# EAGLE board Line sensors (gerber layout) (EAGLE 9.4.1)
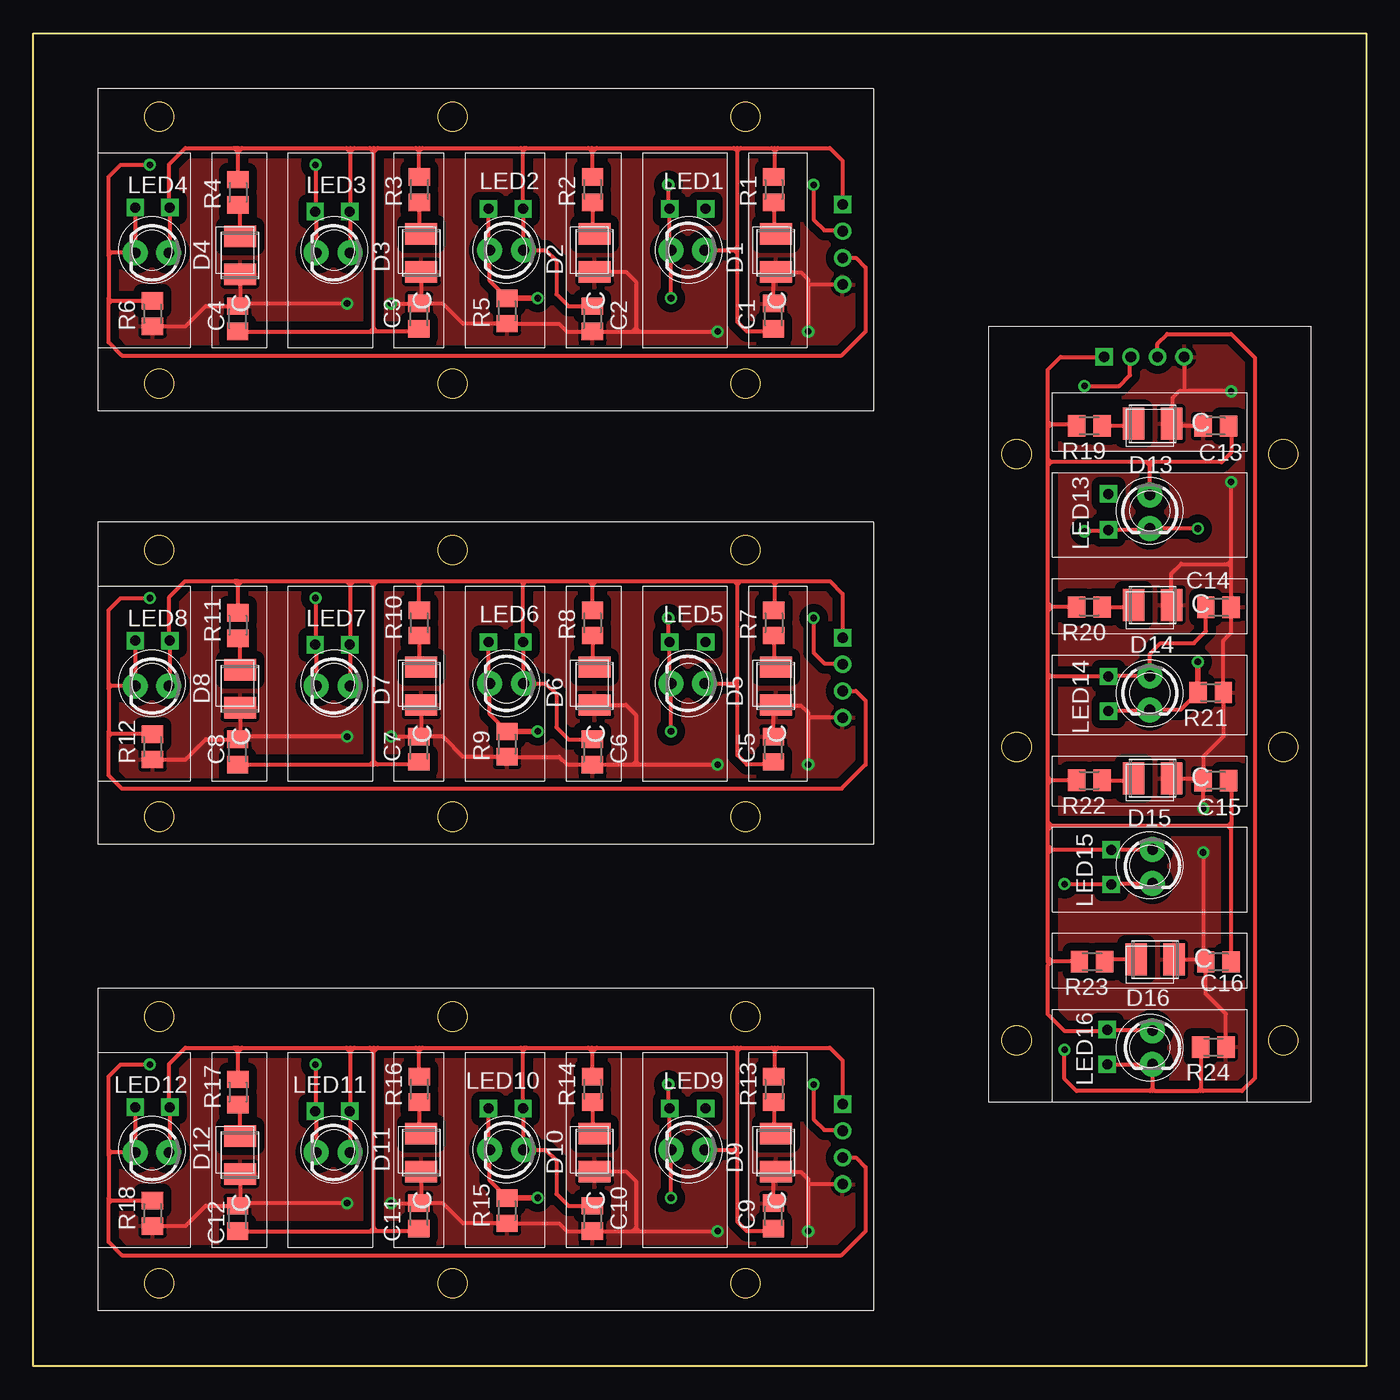
[diagram p0: board, top side]
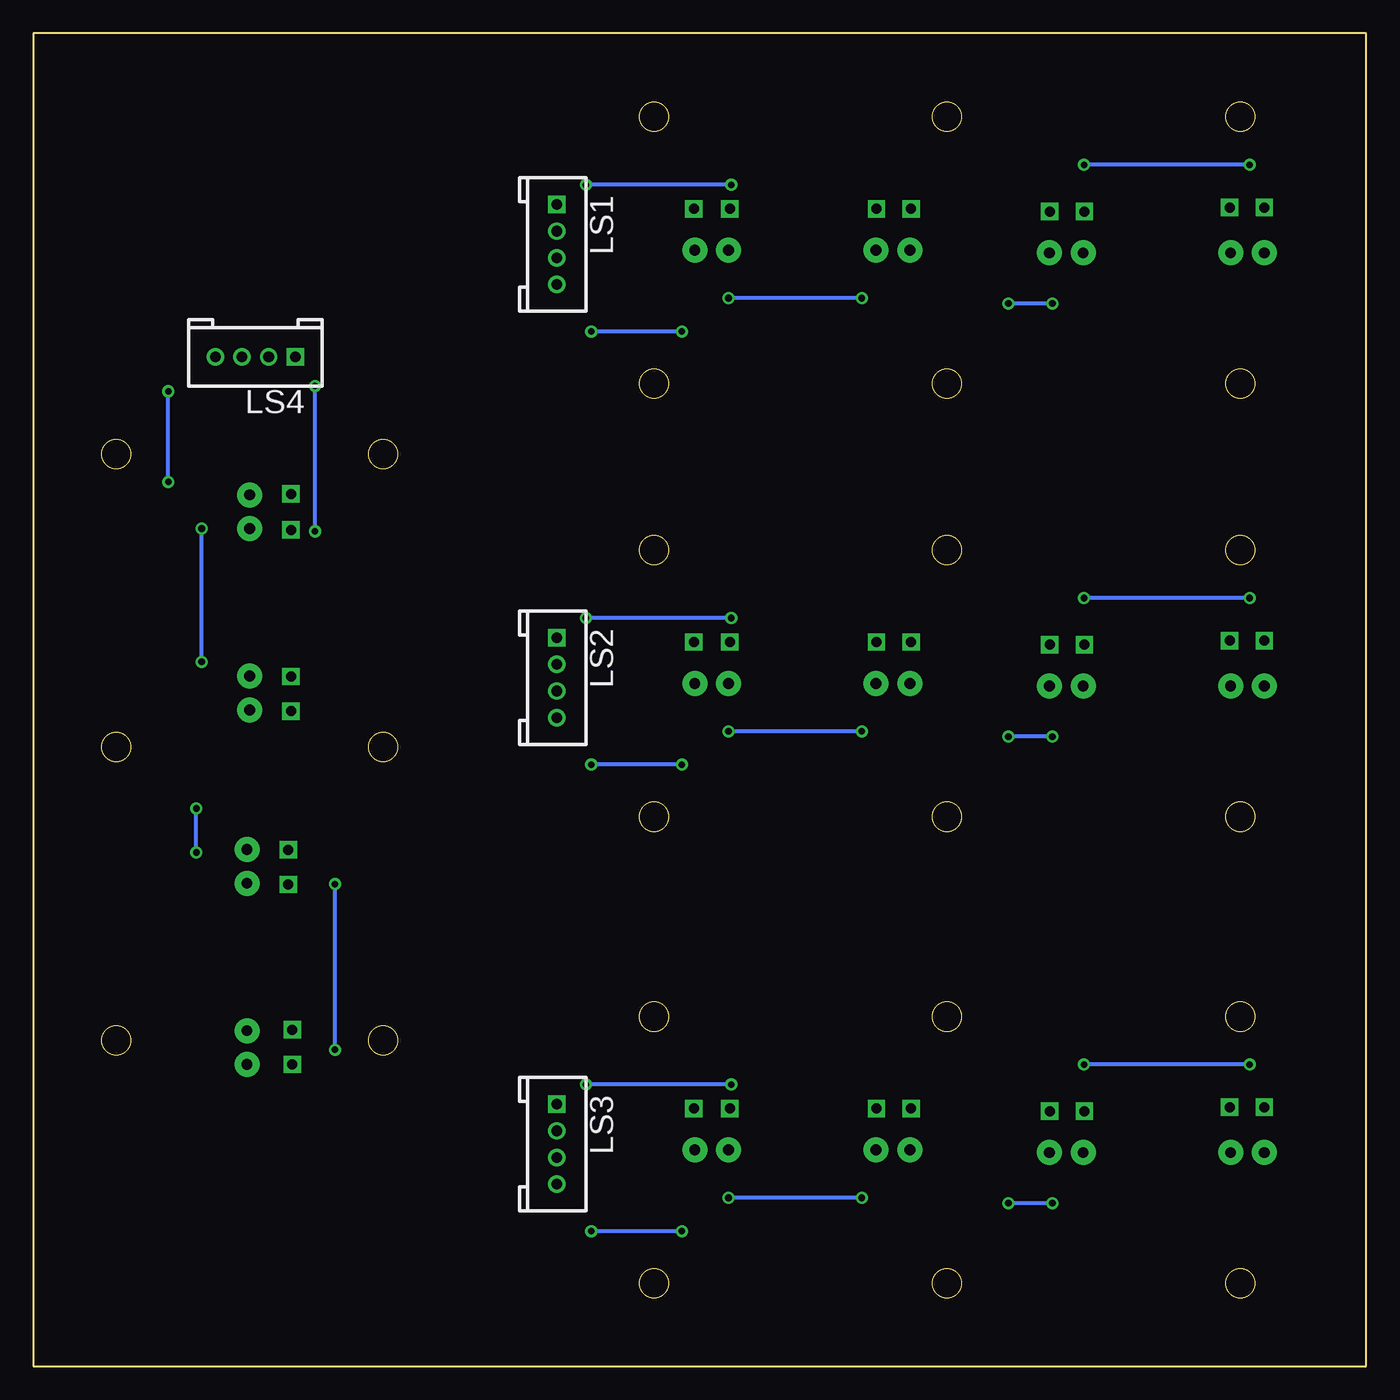
[diagram p1: board, bottom side, seen from below]

Size 100 x 100 mm. Coordinates in mm from the lower left corner, seen from the top.
Outline: 0,0 0,100 100,100 100,0 0,0
Outline: circle at 9.44,73.73 radius 1.1
Outline: circle at 53.44,93.73 radius 1.1
Outline: circle at 31.44,93.73 radius 1.1
Outline: circle at 9.44,93.73 radius 1.1
Outline: circle at 53.44,73.73 radius 1.1
Outline: circle at 31.44,73.73 radius 1.1
Outline: circle at 9.44,73.73 radius 1.1
Outline: circle at 9.44,93.73 radius 1.1
Outline: circle at 9.44,73.73 radius 1.1
Outline: circle at 53.44,93.73 radius 1.1
Outline: circle at 31.44,93.73 radius 1.1
Outline: circle at 9.44,93.73 radius 1.1
Outline: circle at 53.44,73.73 radius 1.1
Outline: circle at 31.44,73.73 radius 1.1
Outline: circle at 9.44,73.73 radius 1.1
Outline: circle at 53.44,93.73 radius 1.1
Outline: circle at 31.44,93.73 radius 1.1
Outline: circle at 9.44,93.73 radius 1.1
Outline: circle at 53.44,73.73 radius 1.1
Outline: circle at 31.44,73.73 radius 1.1
Copper layers (1*16): Top 0.035mm / dielectric 1.5mm / Bottom 0.035mm
Design rules "default": minimum track width 6mil, minimum drill 0.35mm, track to track 6mil, track to pad 6mil, pad to pad 6mil, via to via 6mil, smd to smd 6mil, copper to edge 40mil, drill to drill 6mil, minimum pad ring 10mil, minimum via ring 8mil, stop-mask expansion 4mil, vias tented up to drill 0mil, thermal gap 10mil

## Footprints (pad centres in the part's own frame; a part is rotated, then mirrored left to right if it is on the bottom)
M0805 = smd 1.3 x 1.6: 1 -0.95,0; 2 0.95,0
3528-2PIN = smd 1.6 x 2.4: 1 -1.425,0; 2 1.425,0
LED3MM = drill 0.813 pad 1.88: A -1.27,0; K 1.27,0
4P-2.0 = drill 0.8 pad 1.27 square: 1 -3,0 | drill 0.8 pad 1.27: 2 -1,0; 3 1,0; 4 3,0

## Placement (x,y rotation side)
C1  100n  [M0805]  55.53,78.78 270 top
C2  100n  [M0805]  41.95,78.58 90 top
C3  100n  [M0805]  28.93,78.78 270 top
C4  100n  [M0805]  15.33,78.58 270 top
C5  100n  [M0805]  55.53,46.28 270 top
C6  100n  [M0805]  41.95,46.08 90 top
C7  100n  [M0805]  28.93,46.28 270 top
C8  100n  [M0805]  15.33,46.08 270 top
C9  100n  [M0805]  55.53,11.28 270 top
C10  100n  [M0805]  41.95,11.08 90 top
C11  100n  [M0805]  28.93,11.28 270 top
C12  100n  [M0805]  15.33,11.08 270 top
C13  100n  [M0805]  88.72,70.53 0 top
C14  100n  [M0805]  88.92,56.95 180 top
C15  100n  [M0805]  88.72,43.93 0 top
C16  100n  [M0805]  88.92,30.33 0 top
D1  [3528-2PIN]  55.71,83.53 90 top
D2  [3528-2PIN]  42.11,83.53 90 top
D3  [3528-2PIN]  29.11,83.53 90 top
D4  [3528-2PIN]  15.51,83.33 90 top
D5  [3528-2PIN]  55.71,51.03 90 top
D6  [3528-2PIN]  42.11,51.03 90 top
D7  [3528-2PIN]  29.11,51.03 90 top
D8  [3528-2PIN]  15.51,50.83 90 top
D9  [3528-2PIN]  55.71,16.03 90 top
D10  [3528-2PIN]  42.11,16.03 90 top
D11  [3528-2PIN]  29.11,16.03 90 top
D12  [3528-2PIN]  15.51,15.83 90 top
D13  [3528-2PIN]  83.97,70.71 180 top
D14  [3528-2PIN]  83.97,57.11 180 top
D15  [3528-2PIN]  83.97,44.11 180 top
D16  [3528-2PIN]  84.17,30.51 180 top
LED1  [LED3MM]  49.1,83.73 180 top
LED2  [LED3MM]  35.5,83.73 180 top
LED3  [LED3MM]  22.5,83.53 180 top
LED4  [LED3MM]  8.9,83.53 180 top
LED5  [LED3MM]  49.1,51.23 180 top
LED6  [LED3MM]  35.5,51.23 180 top
LED7  [LED3MM]  22.5,51.03 180 top
LED8  [LED3MM]  8.9,51.03 180 top
LED9  [LED3MM]  49.1,16.23 180 top
LED10  [LED3MM]  35.5,16.23 180 top
LED11  [LED3MM]  22.5,16.03 180 top
LED12  [LED3MM]  8.9,16.03 180 top
LED13  [LED3MM]  83.77,64.1 270 top
LED14  [LED3MM]  83.77,50.5 270 top
LED15  [LED3MM]  83.97,37.5 270 top
LED16  [LED3MM]  83.97,23.9 270 top
LS1  [4P-2.0]  60.72,84.16 270 bottom
LS2  [4P-2.0]  60.72,51.66 270 bottom
LS3  [4P-2.0]  60.72,16.66 270 bottom
LS4  [4P-2.0]  83.34,75.72 180 bottom
R1  330  [M0805]  55.56,88.27 90 top
R2  330  [M0805]  41.96,88.27 90 top
R3  330  [M0805]  28.96,88.27 90 top
R4  330  [M0805]  15.36,88.07 90 top
R5  10k  [M0805]  35.54,79.17 90 top
R6  10k  [M0805]  8.94,78.97 90 top
R7  330  [M0805]  55.56,55.77 90 top
R8  330  [M0805]  41.96,55.77 90 top
R9  10k  [M0805]  35.54,46.67 90 top
R10  330  [M0805]  28.96,55.77 90 top
R11  330  [M0805]  15.36,55.57 90 top
R12  10k  [M0805]  8.94,46.47 90 top
R13  330  [M0805]  55.56,20.77 90 top
R14  330  [M0805]  41.96,20.77 90 top
R15  10k  [M0805]  35.54,11.67 90 top
R16  330  [M0805]  28.96,20.77 90 top
R17  330  [M0805]  15.36,20.57 90 top
R18  10k  [M0805]  8.94,11.47 90 top
R19  330  [M0805]  79.23,70.56 180 top
R20  330  [M0805]  79.23,56.96 180 top
R21  10k  [M0805]  88.33,50.54 180 top
R22  330  [M0805]  79.23,43.96 180 top
R23  330  [M0805]  79.43,30.36 180 top
R24  10k  [M0805]  88.53,23.94 180 top

## Library data of the parts
C1-C16 R1-R24 = resistor
D1-D16 = Wurth_Elektronik_Optoelectronics_rev15b; COMPANY-URL: http://www.we-online.de; CREATED-BY: Christin Otto; CREATED-DATE: APR 2013; DATASHEET-URL: http://katalog.we-online.de/en/led/WL-SMTW?m=t&sq=smtw&sp=&sp=http%3A%2F%2Fwww.we-online.de%2Fweb%2Fen%2Felectronic_components%2Fsearchpage_PBS.php%3Fsearch%3Dsmtw; MANUFACTURER: Würth Elektronik eiSos GmbH
LED1-LED16 = SparkFun
LS1-LS4 = Connector

## Nets
5V: C1.2 C2.2 C3.2 C4.2 LED1.A LED2.A LED3.A LED4.A LS1.1 R1.2 R2.2 R3.2 R4.2
5V1: C5.2 C6.2 C7.2 C8.2 LED5.A LED6.A LED7.A LED8.A LS2.1 R7.2 R8.2 R10.2 R11.2
5V2: C9.2 C10.2 C11.2 C12.2 LED9.A LED10.A LED11.A LED12.A LS3.1 R13.2 R14.2 R16.2 R17.2
5V3: C13.2 C14.2 C15.2 C16.2 LED13.A LED14.A LED15.A LED16.A LS4.1 R19.2 R20.2 R22.2 R23.2
GND: C1.1 C2.1 C3.1 C4.1 D1.1 D2.1 D3.1 D4.1 LS1.4 R5.1 R6.1
GND1: C5.1 C6.1 C7.1 C8.1 D5.1 D6.1 D7.1 D8.1 LS2.4 R9.1 R12.1
GND2: C9.1 C10.1 C11.1 C12.1 D9.1 D10.1 D11.1 D12.1 LS3.4 R15.1 R18.1
GND3: C13.1 C14.1 C15.1 C16.1 D13.1 D14.1 D15.1 D16.1 LS4.4 R21.1 R24.1
N$1: D5.2 R7.1
N$2: D6.2 R8.1
N$3: D1.2 R1.1
N$4: D2.2 R2.1
N$5: D7.2 R10.1
N$6: D8.2 R11.1
N$8: D9.2 R13.1
N$9: D10.2 R14.1
N$10: D11.2 R16.1
N$11: D12.2 R17.1
N$13: D3.2 R3.1
N$14: D13.2 R19.1
N$15: D14.2 R20.1
N$16: D4.2 R4.1
N$17: D15.2 R22.1
N$18: D16.2 R23.1
SIG1: LED1.K LED2.K LS1.2 R5.2
SIG2: LED3.K LED4.K LS1.3 R6.2
SIG3: LED5.K LED6.K LS2.2 R9.2
SIG4: LED7.K LED8.K LS2.3 R12.2
SIG5: LED9.K LED10.K LS3.2 R15.2
SIG6: LED11.K LED12.K LS3.3 R18.2
SIG7: LED13.K LED14.K LS4.2 R21.2
SIG8: LED15.K LED16.K LS4.3 R24.2

## Tracks (layer width: path | path; a pad name or v marks a point on that pad's centre or on a via)
5V  (via drill 0.75 pad 1.3)
  Top 0.305: R1.2 55.64,89.31 55.64,91.17 | 25.54,91.4 25.84,91.4 | 25.84,91.4 28.69,91.4 | 28.69,91.4 28.94,91.4 | 28.94,91.4 29.2,91.4 | 29.2,91.4 36.56,91.4 | 36.56,91.4 36.84,91.4 | 23.77,91.4 23.77,91.1 | 23.77,91.4 24.07,91.4 | 24.07,91.4 25.24,91.4 | 25.24,91.4 25.54,91.4 | R4.2 15.36,91.1 | 15.36,91.1 15.36,91.4 | 15.36,91.4 15.66,91.4 | 15.66,91.4 23.47,91.4 | 23.47,91.4 23.77,91.4 | 36.77,91.19 36.77,91.33 36.84,91.4 | C4.2 25.28,77.63 | 25.28,77.63 25.54,77.63 | 25.8,77.63 28.73,77.63 C3.2 | 25.8,77.63 25.54,77.63 | 25.54,91.4 25.54,91.1 | 25.54,77.63 25.54,77.89 | 25.54,77.89 25.54,91.1 | C2.2 40.14,79.53 39.24,80.43 39.24,82.93 38.44,83.73 LED2.A 36.77,86.8 v36.74,86.83 36.74,91.16 36.77,91.19 | C1.2 55.33,77.63 53.54,77.63 52.82,78.35 52.82,83.48 | 15.36,91.4 15.06,91.4 | 15.06,91.4 11.41,91.4 10.17,90.16 10.17,87 v10.24,86.93 10.24,83.6 LED4.A | 36.84,91.4 36.98,91.4 | 36.98,91.4 41.66,91.4 | 41.66,91.4 41.9,91.4 | 41.9,91.4 42.26,91.4 | 42.26,91.4 52.57,91.4 | 52.57,91.4 52.82,91.4 | 52.82,91.4 53.07,91.4 | 53.07,91.4 55.41,91.4 | 55.41,91.4 55.61,91.4 | 55.61,91.4 55.87,91.4 | 55.87,91.4 59.76,91.4 60.72,90.43 LS1.1 | 55.61,91.4 55.64,91.37 55.64,91.17 | 55.87,91.4 55.64,91.17 | 55.41,91.4 55.64,91.17 | 52.82,83.48 52.82,83.73 | 52.82,83.73 52.82,83.98 | 52.82,83.98 52.82,91.14 | 52.82,91.14 52.82,91.4 | 52.57,91.4 52.82,91.14 | 53.07,91.4 52.82,91.14 | R2.2 41.96,91.1 | 41.96,91.1 41.96,91.34 41.9,91.4 | 41.96,91.1 41.66,91.4 | 41.96,91.1 42.26,91.4 | 36.56,91.4 36.77,91.19 | 36.77,91.19 36.98,91.4 | R3.2 28.94,89.24 28.94,91.14 | 28.94,91.14 28.94,91.4 | 28.69,91.4 28.94,91.14 | 28.94,91.14 29.2,91.4 | 23.77,91.1 23.47,91.4 | 23.77,91.1 24.07,91.4
  Top 0.305: 25.24,91.4 25.54,91.1 | 25.54,91.1 25.84,91.4 | 15.06,91.4 15.36,91.1 | 15.36,91.1 15.66,91.4 | 25.28,77.63 25.54,77.89 | 25.8,77.63 25.54,77.89 | LED1.A 52.57,83.73 | 52.57,83.73 52.82,83.73 | 52.82,83.98 52.57,83.73 | 52.57,83.73 52.82,83.48 | 23.77,91.1 23.77,86.66 v23.74,86.63 23.77,86.6 LED3.A
  Top 0.406: C2.2
5V1  (via drill 0.75 pad 1.3)
  Top 0.305: R7.2 55.64,56.81 55.64,58.67 | 25.54,58.9 25.84,58.9 | 25.84,58.9 28.69,58.9 | 28.69,58.9 28.94,58.9 | 28.94,58.9 29.2,58.9 | 29.2,58.9 36.56,58.9 | 36.56,58.9 36.84,58.9 | 23.77,58.9 23.77,58.6 | 23.77,58.9 24.07,58.9 | 24.07,58.9 25.24,58.9 | 25.24,58.9 25.54,58.9 | R11.2 15.36,58.6 | 15.36,58.6 15.36,58.9 | 15.36,58.9 15.66,58.9 | 15.66,58.9 23.47,58.9 | 23.47,58.9 23.77,58.9 | 36.77,58.69 36.77,58.83 36.84,58.9 | C8.2 25.28,45.13 | 25.28,45.13 25.54,45.13 | 25.8,45.13 28.73,45.13 C7.2 | 25.8,45.13 25.54,45.13 | 25.54,58.9 25.54,58.6 | 25.54,45.13 25.54,45.39 | 25.54,45.39 25.54,58.6 | C6.2 40.14,47.03 39.24,47.93 39.24,50.43 38.44,51.23 LED6.A 36.77,54.3 v36.74,54.33 36.74,58.66 36.77,58.69 | C5.2 55.33,45.13 53.54,45.13 52.82,45.85 52.82,50.98 | 15.36,58.9 15.06,58.9 | 15.06,58.9 11.41,58.9 10.17,57.66 10.17,54.5 v10.24,54.43 10.24,51.1 LED8.A | 36.84,58.9 36.98,58.9 | 36.98,58.9 41.66,58.9 | 41.66,58.9 41.9,58.9 | 41.9,58.9 42.26,58.9 | 42.26,58.9 52.57,58.9 | 52.57,58.9 52.82,58.9 | 52.82,58.9 53.07,58.9 | 53.07,58.9 55.41,58.9 | 55.41,58.9 55.61,58.9 | 55.61,58.9 55.87,58.9 | 55.87,58.9 59.76,58.9 60.72,57.93 LS2.1 | 55.61,58.9 55.64,58.87 55.64,58.67 | 55.87,58.9 55.64,58.67 | 55.41,58.9 55.64,58.67 | 52.82,50.98 52.82,51.23 | 52.82,51.23 52.82,51.48 | 52.82,51.48 52.82,58.64 | 52.82,58.64 52.82,58.9 | 52.57,58.9 52.82,58.64 | 53.07,58.9 52.82,58.64 | R8.2 41.96,58.6 | 41.96,58.6 41.96,58.84 41.9,58.9 | 41.96,58.6 41.66,58.9 | 41.96,58.6 42.26,58.9 | 36.56,58.9 36.77,58.69 | 36.77,58.69 36.98,58.9 | R10.2 28.94,56.74 28.94,58.64 | 28.94,58.64 28.94,58.9 | 28.69,58.9 28.94,58.64 | 28.94,58.64 29.2,58.9 | 23.77,58.6 23.47,58.9 | 23.77,58.6 24.07,58.9
  Top 0.305: 25.24,58.9 25.54,58.6 | 25.54,58.6 25.84,58.9 | 15.06,58.9 15.36,58.6 | 15.36,58.6 15.66,58.9 | 25.28,45.13 25.54,45.39 | 25.8,45.13 25.54,45.39 | LED5.A 52.57,51.23 | 52.57,51.23 52.82,51.23 | 52.82,51.48 52.57,51.23 | 52.57,51.23 52.82,50.98 | 23.77,58.6 23.77,54.16 v23.74,54.13 23.77,54.1 LED7.A
  Top 0.406: C6.2
5V2  (via drill 0.75 pad 1.3)
  Top 0.305: R13.2 55.64,21.81 55.64,23.67 | 25.54,23.9 25.84,23.9 | 25.84,23.9 28.69,23.9 | 28.69,23.9 28.94,23.9 | 28.94,23.9 29.2,23.9 | 29.2,23.9 36.56,23.9 | 36.56,23.9 36.84,23.9 | 23.77,23.9 23.77,23.6 | 23.77,23.9 24.07,23.9 | 24.07,23.9 25.24,23.9 | 25.24,23.9 25.54,23.9 | R17.2 15.36,23.6 | 15.36,23.6 15.36,23.9 | 15.36,23.9 15.66,23.9 | 15.66,23.9 23.47,23.9 | 23.47,23.9 23.77,23.9 | 36.77,23.69 36.77,23.83 36.84,23.9 | C12.2 25.28,10.13 | 25.28,10.13 25.54,10.13 | 25.8,10.13 28.73,10.13 C11.2 | 25.8,10.13 25.54,10.13 | 25.54,23.9 25.54,23.6 | 25.54,10.13 25.54,10.39 | 25.54,10.39 25.54,23.6 | C10.2 40.14,12.03 39.24,12.93 39.24,15.43 38.44,16.23 LED10.A 36.77,19.3 v36.74,19.33 36.74,23.66 36.77,23.69 | C9.2 55.33,10.13 53.54,10.13 52.82,10.85 52.82,15.98 | 15.36,23.9 15.06,23.9 | 15.06,23.9 11.41,23.9 10.17,22.66 10.17,19.5 v10.24,19.43 10.24,16.1 LED12.A | 36.84,23.9 36.98,23.9 | 36.98,23.9 41.66,23.9 | 41.66,23.9 41.9,23.9 | 41.9,23.9 42.26,23.9 | 42.26,23.9 52.57,23.9 | 52.57,23.9 52.82,23.9 | 52.82,23.9 53.07,23.9 | 53.07,23.9 55.41,23.9 | 55.41,23.9 55.61,23.9 | 55.61,23.9 55.87,23.9 | 55.87,23.9 59.76,23.9 60.72,22.93 LS3.1 | 55.61,23.9 55.64,23.87 55.64,23.67 | 55.87,23.9 55.64,23.67 | 55.41,23.9 55.64,23.67 | 52.82,15.98 52.82,16.23 | 52.82,16.23 52.82,16.48 | 52.82,16.48 52.82,23.64 | 52.82,23.64 52.82,23.9 | 52.57,23.9 52.82,23.64 | 53.07,23.9 52.82,23.64 | R14.2 41.96,23.6 | 41.96,23.6 41.96,23.84 41.9,23.9 | 41.96,23.6 41.66,23.9 | 41.96,23.6 42.26,23.9 | 36.56,23.9 36.77,23.69 | 36.77,23.69 36.98,23.9 | R16.2 28.94,21.74 28.94,23.64 | 28.94,23.64 28.94,23.9 | 28.69,23.9 28.94,23.64 | 28.94,23.64 29.2,23.9 | 23.77,23.6 23.47,23.9 | 23.77,23.6 24.07,23.9
  Top 0.305: 25.24,23.9 25.54,23.6 | 25.54,23.6 25.84,23.9 | 15.06,23.9 15.36,23.6 | 15.36,23.6 15.66,23.9 | 25.28,10.13 25.54,10.39 | 25.8,10.13 25.54,10.39 | LED9.A 52.57,16.23 | 52.57,16.23 52.82,16.23 | 52.82,16.48 52.57,16.23 | 52.57,16.23 52.82,15.98 | 23.77,23.6 23.77,19.16 v23.74,19.13 23.77,19.1 LED11.A
  Top 0.406: C10.2
5V3  (via drill 0.75 pad 1.3)
  Top 0.305: R19.2 78.19,70.64 76.33,70.64 | 76.1,40.54 76.1,40.84 | 76.1,40.84 76.1,43.69 | 76.1,43.69 76.1,43.94 | 76.1,43.94 76.1,44.2 | 76.1,44.2 76.1,51.56 | 76.1,51.56 76.1,51.84 | 76.1,38.77 76.4,38.77 | 76.1,38.77 76.1,39.07 | 76.1,39.07 76.1,40.24 | 76.1,40.24 76.1,40.54 | R23.2 76.4,30.36 | 76.4,30.36 76.1,30.36 | 76.1,30.36 76.1,30.66 | 76.1,30.66 76.1,38.47 | 76.1,38.47 76.1,38.77 | 76.31,51.77 76.17,51.77 76.1,51.84 | C16.2 89.87,40.28 | 89.87,40.28 89.87,40.54 | 89.87,40.8 89.87,43.73 C15.2 | 89.87,40.8 89.87,40.54 | 76.1,40.54 76.4,40.54 | 89.87,40.54 89.61,40.54 | 89.61,40.54 76.4,40.54 | C14.2 87.97,55.14 87.07,54.24 84.57,54.24 83.77,53.44 LED14.A 80.7,51.77 v80.67,51.74 76.34,51.74 76.31,51.77 | C13.2 89.87,70.33 89.87,68.54 89.15,67.82 84.02,67.82 | 76.1,30.36 76.1,30.06 | 76.1,30.06 76.1,26.41 77.34,25.17 80.5,25.17 v80.57,25.24 83.9,25.24 LED16.A | 76.1,51.84 76.1,51.98 | 76.1,51.98 76.1,56.66 | 76.1,56.66 76.1,56.9 | 76.1,56.9 76.1,57.26 | 76.1,57.26 76.1,67.57 | 76.1,67.57 76.1,67.82 | 76.1,67.82 76.1,68.07 | 76.1,68.07 76.1,70.41 | 76.1,70.41 76.1,70.61 | 76.1,70.61 76.1,70.87 | 76.1,70.87 76.1,74.76 77.07,75.72 LS4.1 | 76.1,70.61 76.13,70.64 76.33,70.64 | 76.1,70.87 76.33,70.64 | 76.1,70.41 76.33,70.64 | 84.02,67.82 83.77,67.82 | 83.77,67.82 83.52,67.82 | 83.52,67.82 76.36,67.82 | 76.36,67.82 76.1,67.82 | 76.1,67.57 76.36,67.82 | 76.1,68.07 76.36,67.82 | R20.2 76.4,56.96 | 76.4,56.96 76.16,56.96 76.1,56.9 | 76.4,56.96 76.1,56.66 | 76.4,56.96 76.1,57.26 | 76.1,51.56 76.31,51.77 | 76.31,51.77 76.1,51.98 | R22.2 78.26,43.94 76.36,43.94 | 76.36,43.94 76.1,43.94 | 76.1,43.69 76.36,43.94 | 76.36,43.94 76.1,44.2 | 76.4,38.77 76.1,38.47 | 76.4,38.77 76.1,39.07
  Top 0.305: 76.1,40.24 76.4,40.54 | 76.4,40.54 76.1,40.84 | 76.1,30.06 76.4,30.36 | 76.4,30.36 76.1,30.66 | 89.87,40.28 89.61,40.54 | 89.87,40.8 89.61,40.54 | LED13.A 83.77,67.57 | 83.77,67.57 83.77,67.82 | 83.52,67.82 83.77,67.57 | 83.77,67.57 84.02,67.82 | 76.4,38.77 80.84,38.77 v80.87,38.74 80.9,38.77 LED15.A
  Top 0.406: C14.2
GND  (via drill 0.5)
  Top 0.305: D3.1 29.11,79.91 C3.1 | C1.1 55.53,81.93 D1.1 55.78,82.03 57.64,82.03 58.14,81.53 58.14,81.03 | D4.1 15.51,79.71 C4.1 12.94,79.53 11.43,78.02 R6.1 | C3.1 30.74,79.73 32.25,78.22 R5.1 39.45,78.22 40.04,77.63 C2.1 44.95,77.63 | D2.1 44.46,82.11 45.2,81.37 45.2,77.88 | v23.54,79.73 15.53,79.73 | v26.84,79.73 C3.1 | v58.14,77.63 58.14,81.03 | LS1.4 58.27,81.16 58.14,81.03 | v51.34,77.63 45.45,77.63 | 44.95,77.63 45.2,77.63 | 45.2,77.63 45.45,77.63 | 45.2,77.88 45.2,77.63 | 44.95,77.63 45.2,77.88 | 45.2,77.88 45.45,77.63
  Top 0.406: v26.84,79.73 | 15.53,79.73 C4.1
  Bottom 0.305: v23.54,79.73 v26.84,79.73 | v51.34,77.63 v58.14,77.63
  pour Top (isolate 0.61): 4.26,96.43 64.3,96.33 64.3,70.8 4.26,70.89
GND1  (via drill 0.5)
  Top 0.305: D7.1 29.11,47.41 C7.1 | C5.1 55.53,49.43 D5.1 55.78,49.53 57.64,49.53 58.14,49.03 58.14,48.53 | D8.1 15.51,47.21 C8.1 12.94,47.03 11.43,45.52 R12.1 | C7.1 30.74,47.23 32.25,45.72 R9.1 39.45,45.72 40.04,45.13 C6.1 44.95,45.13 | D6.1 44.46,49.61 45.2,48.87 45.2,45.38 | v23.54,47.23 15.53,47.23 | v26.84,47.23 C7.1 | v58.14,45.13 58.14,48.53 | LS2.4 58.27,48.66 58.14,48.53 | v51.34,45.13 45.45,45.13 | 44.95,45.13 45.2,45.13 | 45.2,45.13 45.45,45.13 | 45.2,45.38 45.2,45.13 | 44.95,45.13 45.2,45.38 | 45.2,45.38 45.45,45.13
  Top 0.406: v26.84,47.23 | 15.53,47.23 C8.1
  Bottom 0.305: v23.54,47.23 v26.84,47.23 | v51.34,45.13 v58.14,45.13
  pour Top (isolate 0.61): 4.26,63.93 64.3,63.84 64.3,38.3 4.26,38.4
GND2  (via drill 0.5)
  Top 0.305: D11.1 29.11,12.41 C11.1 | C9.1 55.53,14.43 D9.1 55.78,14.53 57.64,14.53 58.14,14.03 58.14,13.53 | D12.1 15.51,12.21 C12.1 12.94,12.03 11.43,10.52 R18.1 | C11.1 30.74,12.23 32.25,10.72 R15.1 39.45,10.72 40.04,10.13 C10.1 44.95,10.13 | D10.1 44.46,14.61 45.2,13.87 45.2,10.38 | v23.54,12.23 15.53,12.23 | v26.84,12.23 C11.1 | v58.14,10.13 58.14,13.53 | LS3.4 58.27,13.66 58.14,13.53 | v51.34,10.13 45.45,10.13 | 44.95,10.13 45.2,10.13 | 45.2,10.13 45.45,10.13 | 45.2,10.38 45.2,10.13 | 44.95,10.13 45.2,10.38 | 45.2,10.38 45.45,10.13
  Top 0.406: v26.84,12.23 | 15.53,12.23 C12.1
  Bottom 0.305: v23.54,12.23 v26.84,12.23 | v51.34,10.13 v58.14,10.13
  pour Top (isolate 0.61): 4.26,28.93 64.3,28.84 64.3,3.3 4.26,3.4
GND3  (via drill 0.5)
  Top 0.305: D15.1 87.59,44.11 C15.1 | C13.1 85.57,70.53 D13.1 85.47,70.78 85.47,72.64 85.97,73.14 86.47,73.14 | D16.1 87.79,30.51 C16.1 87.97,27.94 89.48,26.43 R24.1 | C15.1 87.77,45.74 89.28,47.25 R21.1 89.28,54.45 89.87,55.04 C14.1 89.87,59.95 | D14.1 85.39,59.46 86.13,60.2 89.62,60.2 | v87.77,38.54 87.77,30.53 | v87.77,41.84 C15.1 | v89.87,73.14 86.47,73.14 | LS4.4 86.34,73.27 86.47,73.14 | v89.87,66.34 89.87,60.45 | 89.87,59.95 89.87,60.2 | 89.87,60.2 89.87,60.45 | 89.62,60.2 89.87,60.2 | 89.87,59.95 89.62,60.2 | 89.62,60.2 89.87,60.45
  Top 0.406: v87.77,41.84 | 87.77,30.53 C16.1
  Bottom 0.305: v87.77,38.54 v87.77,41.84 | v89.87,66.34 v89.87,73.14
  pour Top (isolate 0.61): 71.07,19.26 71.17,79.3 96.7,79.3 96.61,19.26
N$1
  Top 0.305: R7.1 55.56,52.61 D5.2
N$2
  Top 0.305: R8.1 41.96,52.61 D6.2
N$3
  Top 0.305: R1.1 55.56,85.11 D1.2
N$4
  Top 0.305: R2.1 41.96,85.11 D2.2
N$5
  Top 0.305: R10.1 28.96,52.61 D7.2
N$6
  Top 0.305: D8.2 15.51,54.48 R11.1
N$7  (via drill 0.75 pad 1.3)
  other vias: 50.44,54.33
N$8
  Top 0.305: R13.1 55.56,17.61 D9.2
N$9
  Top 0.305: R14.1 41.96,17.61 D10.2
N$10
  Top 0.305: R16.1 28.96,17.61 D11.2
N$11
  Top 0.305: D12.2 15.51,19.48 R17.1
N$12  (via drill 0.75 pad 1.3)
  other vias: 50.44,19.33
N$13
  Top 0.305: R3.1 28.96,85.11 D3.2
N$14
  Top 0.305: R19.1 82.39,70.56 D13.2
N$15
  Top 0.305: R20.1 82.39,56.96 D14.2
N$16
  Top 0.305: D4.2 15.51,86.98 R4.1
N$17
  Top 0.305: R22.1 82.39,43.96 D15.2
N$18
  Top 0.305: D16.2 80.52,30.51 R23.1
N$19  (via drill 0.75 pad 1.3)
  other vias: 80.67,65.44
N$22  (via drill 0.75 pad 1.3)
  other vias: 50.44,86.83
SIG1  (via drill 0.5, 0.75 pad 1.3)
  Top 0.305: R5.2 34.23,81.43 LED2.K 34.14,83.82 v34.14,86.83 | v47.84,80.13 LED1.K | v58.54,88.63 58.54,86.03 59.34,85.23 60.65,85.23 LS1.2 | LED1.K 47.74,83.82 v47.74,86.83 47.64,86.93 v47.64,88.63
  Top 0.406: R5.2 37.83,80.12 v37.84,80.13 | LED1.K
  Bottom 0.305: v37.84,80.13 v47.84,80.13 | v47.64,88.63 v58.54,88.63
SIG2  (via drill 0.5, 0.75 pad 1.3)
  Top 0.305: LS1.3 61.71,83.16 62.44,82.43 62.44,77.63 60.64,75.83 6.64,75.83 5.64,76.83 5.64,79.73 | 5.64,79.73 5.64,79.93 | 5.64,79.93 5.64,80.11 | 5.64,83.34 5.64,80.11 | 5.64,83.34 5.64,83.53 | 5.64,83.53 5.64,83.73 | 5.64,83.73 5.64,89.23 6.54,90.13 v8.74,90.13 | R6.2 5.83,79.92 | 5.83,79.92 5.65,79.92 5.64,79.93 | 5.64,83.53 | 5.83,83.53 LED4.K v7.64,86.93 | 5.64,83.53 5.83,83.53 | 5.64,83.73 5.83,83.54 5.83,83.53 | 5.64,83.34 5.83,83.53 | 5.64,80.11 5.83,79.92 | 5.83,79.92 5.64,79.73 | 21.14,90.1 v21.17,90.13 21.17,86.66 v21.14,86.63 21.23,86.54 LED3.K
  Bottom 0.305: v8.74,90.13 v21.17,90.13
SIG3  (via drill 0.5, 0.75 pad 1.3)
  Top 0.305: R9.2 34.23,48.93 LED6.K 34.14,51.32 v34.14,54.33 | v47.84,47.63 LED5.K | v58.54,56.13 58.54,53.53 59.34,52.73 60.65,52.73 LS2.2 | LED5.K 47.74,51.32 v47.74,54.33 47.64,54.43 v47.64,56.13
  Top 0.406: R9.2 37.83,47.62 v37.84,47.63 | LED5.K
  Bottom 0.305: v37.84,47.63 v47.84,47.63 | v47.64,56.13 v58.54,56.13
SIG4  (via drill 0.5, 0.75 pad 1.3)
  Top 0.305: LS2.3 61.71,50.66 62.44,49.93 62.44,45.13 60.64,43.33 6.64,43.33 5.64,44.33 5.64,47.23 | 5.64,47.23 5.64,47.43 | 5.64,47.43 5.64,47.61 | 5.64,50.84 5.64,47.61 | 5.64,50.84 5.64,51.03 | 5.64,51.03 5.64,51.23 | 5.64,51.23 5.64,56.73 6.54,57.63 v8.74,57.63 | R12.2 5.83,47.42 | 5.83,47.42 5.65,47.42 5.64,47.43 | 5.64,51.03 | 5.83,51.03 LED8.K v7.64,54.43 | 5.64,51.03 5.83,51.03 | 5.64,51.23 5.83,51.04 5.83,51.03 | 5.64,50.84 5.83,51.03 | 5.64,47.61 5.83,47.42 | 5.83,47.42 5.64,47.23 | 21.14,57.6 v21.17,57.63 21.17,54.16 v21.14,54.13 21.23,54.04 LED7.K
  Bottom 0.305: v8.74,57.63 v21.17,57.63
SIG5  (via drill 0.5, 0.75 pad 1.3)
  Top 0.305: R15.2 34.23,13.93 LED10.K 34.14,16.32 v34.14,19.33 | v47.84,12.63 LED9.K | v58.54,21.13 58.54,18.53 59.34,17.73 60.65,17.73 LS3.2 | LED9.K 47.74,16.32 v47.74,19.33 47.64,19.43 v47.64,21.13
  Top 0.406: R15.2 37.83,12.62 v37.84,12.63 | LED9.K
  Bottom 0.305: v37.84,12.63 v47.84,12.63 | v47.64,21.13 v58.54,21.13
SIG6  (via drill 0.5, 0.75 pad 1.3)
  Top 0.305: LS3.3 61.71,15.66 62.44,14.93 62.44,10.13 60.64,8.33 6.64,8.33 5.64,9.33 5.64,12.23 | 5.64,12.23 5.64,12.43 | 5.64,12.43 5.64,12.61 | 5.64,15.84 5.64,12.61 | 5.64,15.84 5.64,16.03 | 5.64,16.03 5.64,16.23 | 5.64,16.23 5.64,21.73 6.54,22.63 v8.74,22.63 | R18.2 5.83,12.42 | 5.83,12.42 5.65,12.42 5.64,12.43 | 5.64,16.03 | 5.83,16.03 LED12.K v7.64,19.43 | 5.64,16.03 5.83,16.03 | 5.64,16.23 5.83,16.04 5.83,16.03 | 5.64,15.84 5.83,16.03 | 5.64,12.61 5.83,12.42 | 5.83,12.42 5.64,12.23 | 21.14,22.6 v21.17,22.63 21.17,19.16 v21.14,19.13 21.23,19.04 LED11.K
  Bottom 0.305: v8.74,22.63 v21.17,22.63
SIG7  (via drill 0.5, 0.75 pad 1.3)
  Top 0.305: R21.2 86.07,49.23 LED14.K 83.68,49.14 v80.67,49.14 | v87.37,62.84 LED13.K | v78.87,73.54 81.47,73.54 82.27,74.34 82.27,75.65 LS4.2 | LED13.K 83.68,62.74 v80.67,62.74 80.57,62.64 v78.87,62.64
  Top 0.406: R21.2 87.38,52.83 v87.37,52.84 | LED13.K
  Bottom 0.305: v87.37,52.84 v87.37,62.84 | v78.87,62.64 v78.87,73.54
SIG8  (via drill 0.5, 0.75 pad 1.3)
  Top 0.305: LS4.3 84.34,76.71 85.07,77.44 89.87,77.44 91.67,75.64 91.67,21.64 90.67,20.64 87.77,20.64 | 87.77,20.64 87.57,20.64 | 87.57,20.64 87.39,20.64 | 84.16,20.64 87.39,20.64 | 84.16,20.64 83.97,20.64 | 83.97,20.64 83.77,20.64 | 83.77,20.64 78.27,20.64 77.37,21.54 v77.37,23.74 | R24.2 87.58,20.83 | 87.58,20.83 87.58,20.65 87.57,20.64 | 83.97,20.64 | 83.97,20.83 LED16.K v80.57,22.64 | 83.97,20.64 83.97,20.83 | 83.77,20.64 83.96,20.83 83.97,20.83 | 84.16,20.64 83.97,20.83 | 87.39,20.64 87.58,20.83 | 87.58,20.83 87.77,20.64 | 77.4,36.14 v77.37,36.17 80.84,36.17 v80.87,36.14 80.96,36.23 LED15.K
  Bottom 0.305: v77.37,23.74 v77.37,36.17